# Altium PCB AIR.PcbDoc
Units mil, origin at the board's own origin, x right, y up, seen from the top; angles counter-clockwise.
Board outline 2100 x 1900 mil, 2 copper layers (Top Layer, Bottom Layer); 5 components, 31 nets, 68 pads, 0 vias.
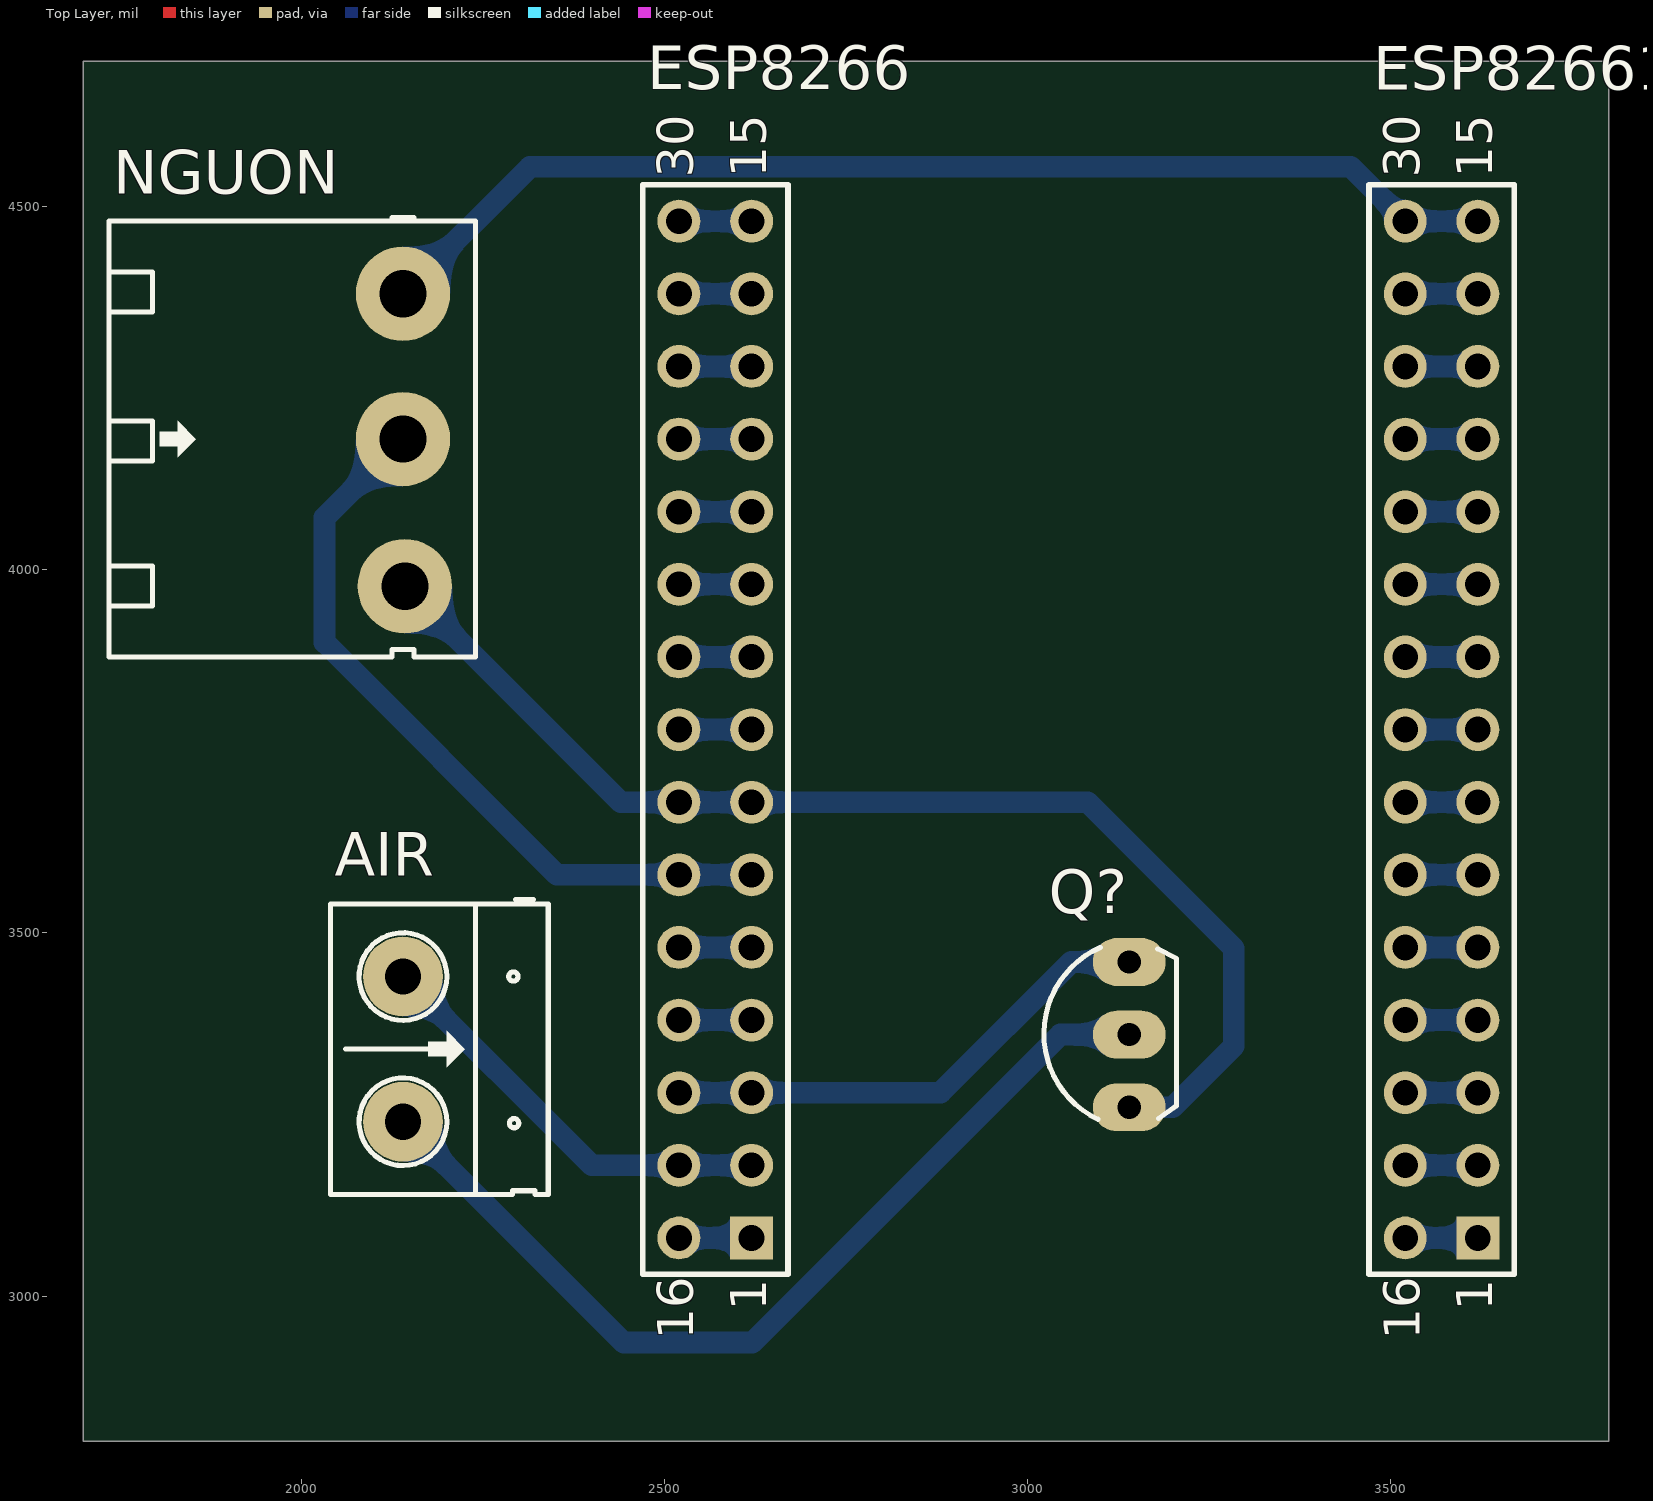
[diagram p0: Top Layer view]
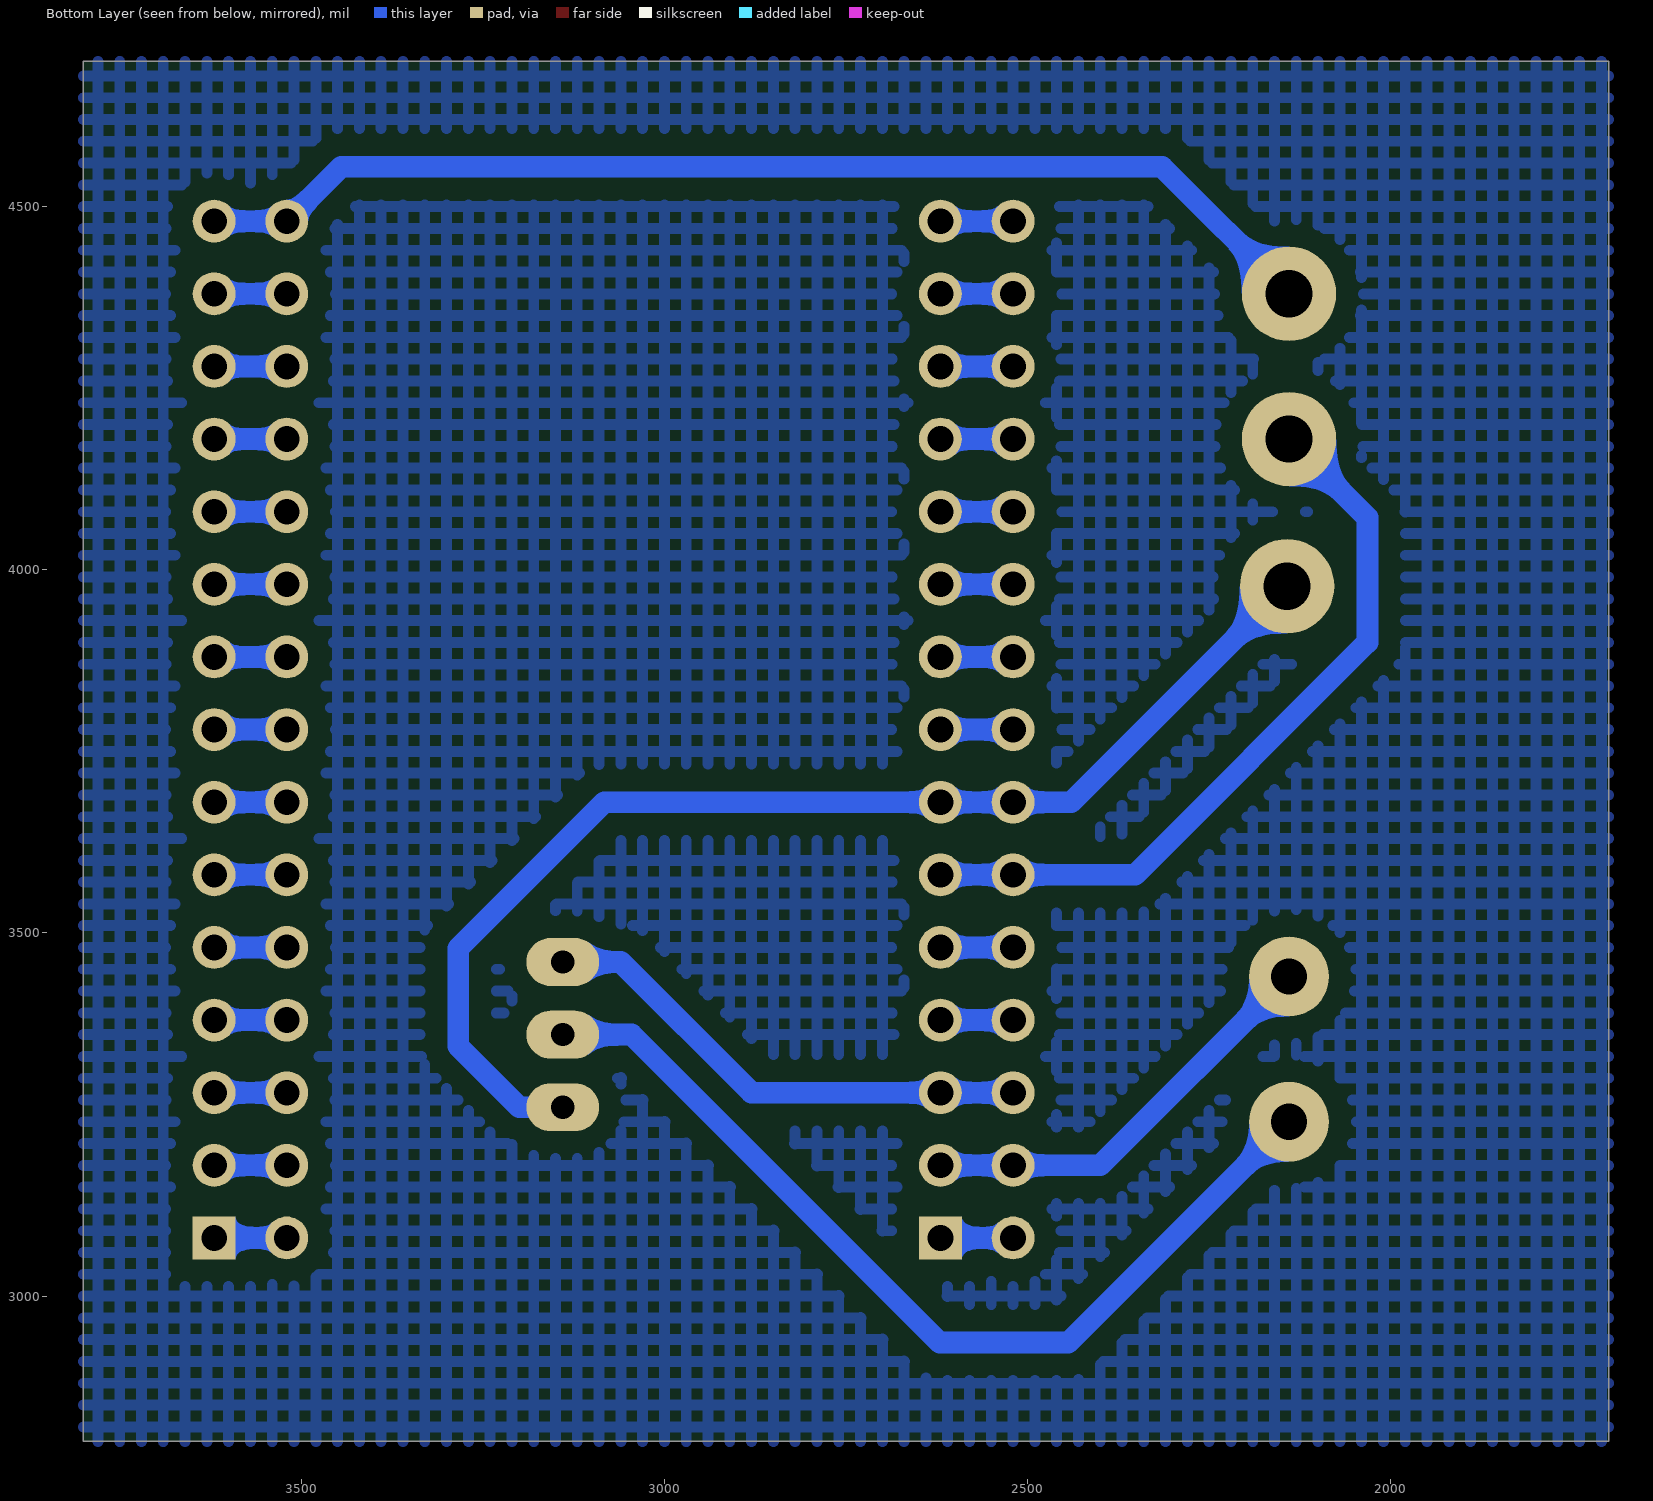
[diagram p1: Bottom Layer view, seen from below]

## Layer stack, top to bottom
Top Solder: solder mask 0.4, Solder Resist, Dk 3.5
Top Layer: signal copper 1.4
Dielectric 1: dielectric 12.6, FR-4, Dk 4.8
Bottom Layer: signal copper 1.4
Bottom Solder: solder mask 0.4, Solder Resist, Dk 3.5

## Board outline
1700,2800 3800,2800 3800,4700 1700,4700

## Design rules (kind name [scope] priority, off if disabled: settings)
Clearance [All] p1: gap=30
PolygonConnect [All] p1: connectstyle=Relief reliefconductorwidth=10 reliefentries=4 polygonreliefangle="90 Angle" airgapwidth=10
RoomDefinition Air [InComponentClass('Air')] p1: confinementstyle=ConfineIn formatcopy=TRUE lockcomponents=FALSE outline 7037.62,1012.38 9722.62,1012.38 9722.62,2827.38 7037.62,2827.38
RoutingLayers [All] p1: top layer_v5=FALSE bottom layer_v5=TRUE
RoutingVias [All] p1: holewidth=30 width=80 viastyle="Through Hole" minholewidth=30 minwidth=80 maxholewidth=30 maxwidth=80
SolderMaskExpansion [All] p1: expansion=4
Width [All] p1: maxlimit=30 minlimit=20 preferedwidth=30
29 further rules are at their usual default settings.

## Components (designator, comment, footprint, x,y, rotation, side; value= is the part's Value field where it differs from the comment)
AIR "Header 2" HED2 2140,3440 r270 top
ESP8266 "Header 15X2A" HDR2X15_CEN 2620,3080 r90 top
ESP82661 "Header 15X2A" HDR2X15_CEN 3620,3080 r90 top
NGUON "Header 3" HED3T 2140,4380 r270 top
Q? "C1815" QTO-92 3140,3360 r90 top

## Footprints (in the part's own frame and the unit in brackets; to place one, negate y for a bottom-side part, rotate by r counter-clockwise, add the part's x,y. Pads: shape width x height; smd on the part's side, far side on the other; paste and mask are expansions set on the pad)
HDR2X15_CEN [mm] "Connector; Header; 15x2 Position"
  rect 1.5x1.5 hole 0.9: 1(0,0)
  round 1.5 hole 0.9: 2(2.54,0) 3(5.08,0) 4(7.62,0) 5(10.16,0) 6(12.7,0) 7(15.24,0) 8(17.78,0) 9(20.32,0) 10(22.86,0) 11(25.4,0) 12(27.94,0) 13(30.48,0) 14(33.02,0) 15(35.56,0) 16(0,2.54) 17(2.54,2.54) 18(5.08,2.54) 19(7.62,2.54) 20(10.16,2.54) 21(12.7,2.54) 22(15.24,2.54) 23(17.78,2.54) 24(20.32,2.54) 25(22.86,2.54) 26(25.4,2.54) 27(27.94,2.54) 28(30.48,2.54) 29(33.02,2.54) 30(35.56,2.54)
  silkscreen extent -1.27,-1.27 36.83,3.81, body extent -1.27,-1.27 36.83,3.81, height 1.5
HED2 [mil] "Header 2, 2 pin, hight 300mil, Pin to Pin 200, Colour Green"
  round 110 hole 50: 1(0,0) 2(200,0)
  silkscreen extent -106,-100 300,200, body extent -92,-90 302,205, height 394
HED3T [mil] "Header 3, 3 pin, hight 300mil, Pin to Pin 200, Colour Green"
  round 130 hole 65: 1(0,0) 2(200,0) 3(402.62,2.62)
  silkscreen extent -105,-405 500,100, body extent -95,-404 496,68, height 124
QTO-92 [mil] "TO-92"
  oval 66x100 hole 32: 1(-100,0) 2(0,0) 3(100,0)
  silkscreen extent -117,-65 120,118, body extent -109,-66 109,95, height 245

## Part data
AIR: "Header 2 (Green)"
ESP8266 ESP82661: "Header, 15-Pin, Dual row"
NGUON: library part Hed3, "Header 3 (Green)"
Q?: "NPN 600mW, ECB"

## Nets (pads, with @x,y where several pads share a name; then routed paths per layer and width w, separated by ;. In a path a pad name is that pad's centre, name@x,y a point inside that pad or via, vN(x,y) a via of type N, cw(c..) or ccw(c..) an arc to the next point about the centre after c; other vN are vias at no path point)
3,3V: ESP8266.6 ESP8266.21 NGUON.2 | length 1045.3
  Bottom Layer w30: NGUON.2 2032,4072 2032,3900 2352,3580 ESP8266.21 ESP8266.6
3,3V1: ESP82661.11 ESP82661.26 | length 100
  Bottom Layer w30: ESP82661.26 ESP82661.11
3,3V2: ESP8266.15 ESP8266.30 | length 100
  Bottom Layer w30: ESP8266.30 ESP8266.15
5V: ESP82661.15 ESP82661.30 NGUON.1 | length 1583.6
  Bottom Layer w30: NGUON.1 2315,4555 3445,4555 ESP82661.30 ESP82661.15
A0: ESP82661.1 ESP82661.16 | length 100
  Bottom Layer w30: ESP82661.16 ESP82661.1
CLK: ESP82661.9 ESP82661.24 | length 100
  Bottom Layer w30: ESP82661.24 ESP82661.9
CMD: ESP82661.7 ESP82661.22 | length 100
  Bottom Layer w30: ESP82661.22 ESP82661.7
D0: ESP8266.1 ESP8266.16 | length 100
  Bottom Layer w30: ESP8266.16 ESP8266.1
D1: AIR.1 ESP8266.2 ESP8266.17 | length 587.7
  Bottom Layer w30: AIR.1 2400,3180 ESP8266.17 ESP8266.2
D2: ESP8266.3 ESP8266.18 Q?.3 | length 694.6
  Bottom Layer w30: ESP8266.18 ESP8266.3 2880,3280 3060,3460 Q?.3
D3: ESP8266.4 ESP8266.19 | length 100
  Bottom Layer w30: ESP8266.19 ESP8266.4
D4: ESP8266.5 ESP8266.20 | length 100
  Bottom Layer w30: ESP8266.20 ESP8266.5
D5: ESP8266.8 ESP8266.23 | length 100
  Bottom Layer w30: ESP8266.23 ESP8266.8
D6: ESP8266.9 ESP8266.24 | length 100
  Bottom Layer w30: ESP8266.24 ESP8266.9
D7: ESP8266.10 ESP8266.25 | length 100
  Bottom Layer w30: ESP8266.25 ESP8266.10
D8: ESP8266.11 ESP8266.26 | length 100
  Bottom Layer w30: ESP8266.26 ESP8266.11
EN: ESP82661.12 ESP82661.27 | length 100
  Bottom Layer w30: ESP82661.27 ESP82661.12
GND: ESP8266.7 ESP8266.22 NGUON.3 Q?.1 | length 1661.6
  Bottom Layer w30: NGUON.3 2440,3680 ESP8266.22 ESP8266.7 3083,3680 3284,3479 3284,3344 3200,3260 Q?.1
GND1: ESP82661.14 ESP82661.29 | length 100
  Bottom Layer w30: ESP82661.29 ESP82661.14
GND2: ESP82661.10 ESP82661.25 | length 100
  Bottom Layer w30: ESP82661.25 ESP82661.10
GND3: ESP8266.14 ESP8266.29 | length 100
  Bottom Layer w30: ESP8266.29 ESP8266.14
LED-: AIR.2 Q?.2 | length 1301.5
  Bottom Layer w30: AIR.2 2444,2936 2621,2936 3045,3360 Q?.2
RST: ESP82661.13 ESP82661.28 | length 100
  Bottom Layer w30: ESP82661.28 ESP82661.13
RSV: ESP82661.2 ESP82661.17 | length 100
  Bottom Layer w30: ESP82661.17 ESP82661.2
RSV1: ESP82661.3 ESP82661.18 | length 100
  Bottom Layer w30: ESP82661.18 ESP82661.3
RX: ESP8266.12 ESP8266.27 | length 100
  Bottom Layer w30: ESP8266.27 ESP8266.12
SD0: ESP82661.8 ESP82661.23 | length 100
  Bottom Layer w30: ESP82661.23 ESP82661.8
SD1: ESP82661.6 ESP82661.21 | length 100
  Bottom Layer w30: ESP82661.21 ESP82661.6
SD2: ESP82661.5 ESP82661.20 | length 100
  Bottom Layer w30: ESP82661.20 ESP82661.5
SD3: ESP82661.4 ESP82661.19 | length 100
  Bottom Layer w30: ESP82661.19 ESP82661.4
TX: ESP8266.13 ESP8266.28 | length 100
  Bottom Layer w30: ESP8266.28 ESP8266.13

## Polygon pours and split planes (outlines as drawn)
no net on Bottom Layer "Top Layer-No Net" (hatched 90Degree grid 30 track 15, pour order 2): 1700,4700 3800,4700 3800,2800 1700,2800 1700,4700

## Text inside footprints (layer, text, board x,y; h text height)
ESP8266: Top Overlay "30" at 2540,4540 h50 r90; Top Overlay "15" at 2640,4540 h50 r90; Top Overlay "1" at 2640,2980 h50 r90; Top Overlay "16" at 2540,2940 h50 r90
ESP82661: Top Overlay "30" at 3540,4540 h50 r90; Top Overlay "15" at 3640,4540 h50 r90; Top Overlay "1" at 3640,2980 h50 r90; Top Overlay "16" at 3540,2940 h50 r90